# Altium PCB analogtestboard.PCBDOC (part 2 of 2)
Units mil, origin at the board's own origin, x right, y up, seen from the top; angles counter-clockwise.
Board outline 5890 x 7000 mil, 4 copper layers (Top Layer, Internal Plane 1, Internal Plane 2, Bottom Layer); 280 components, 161 nets, 858 pads, 237 vias.
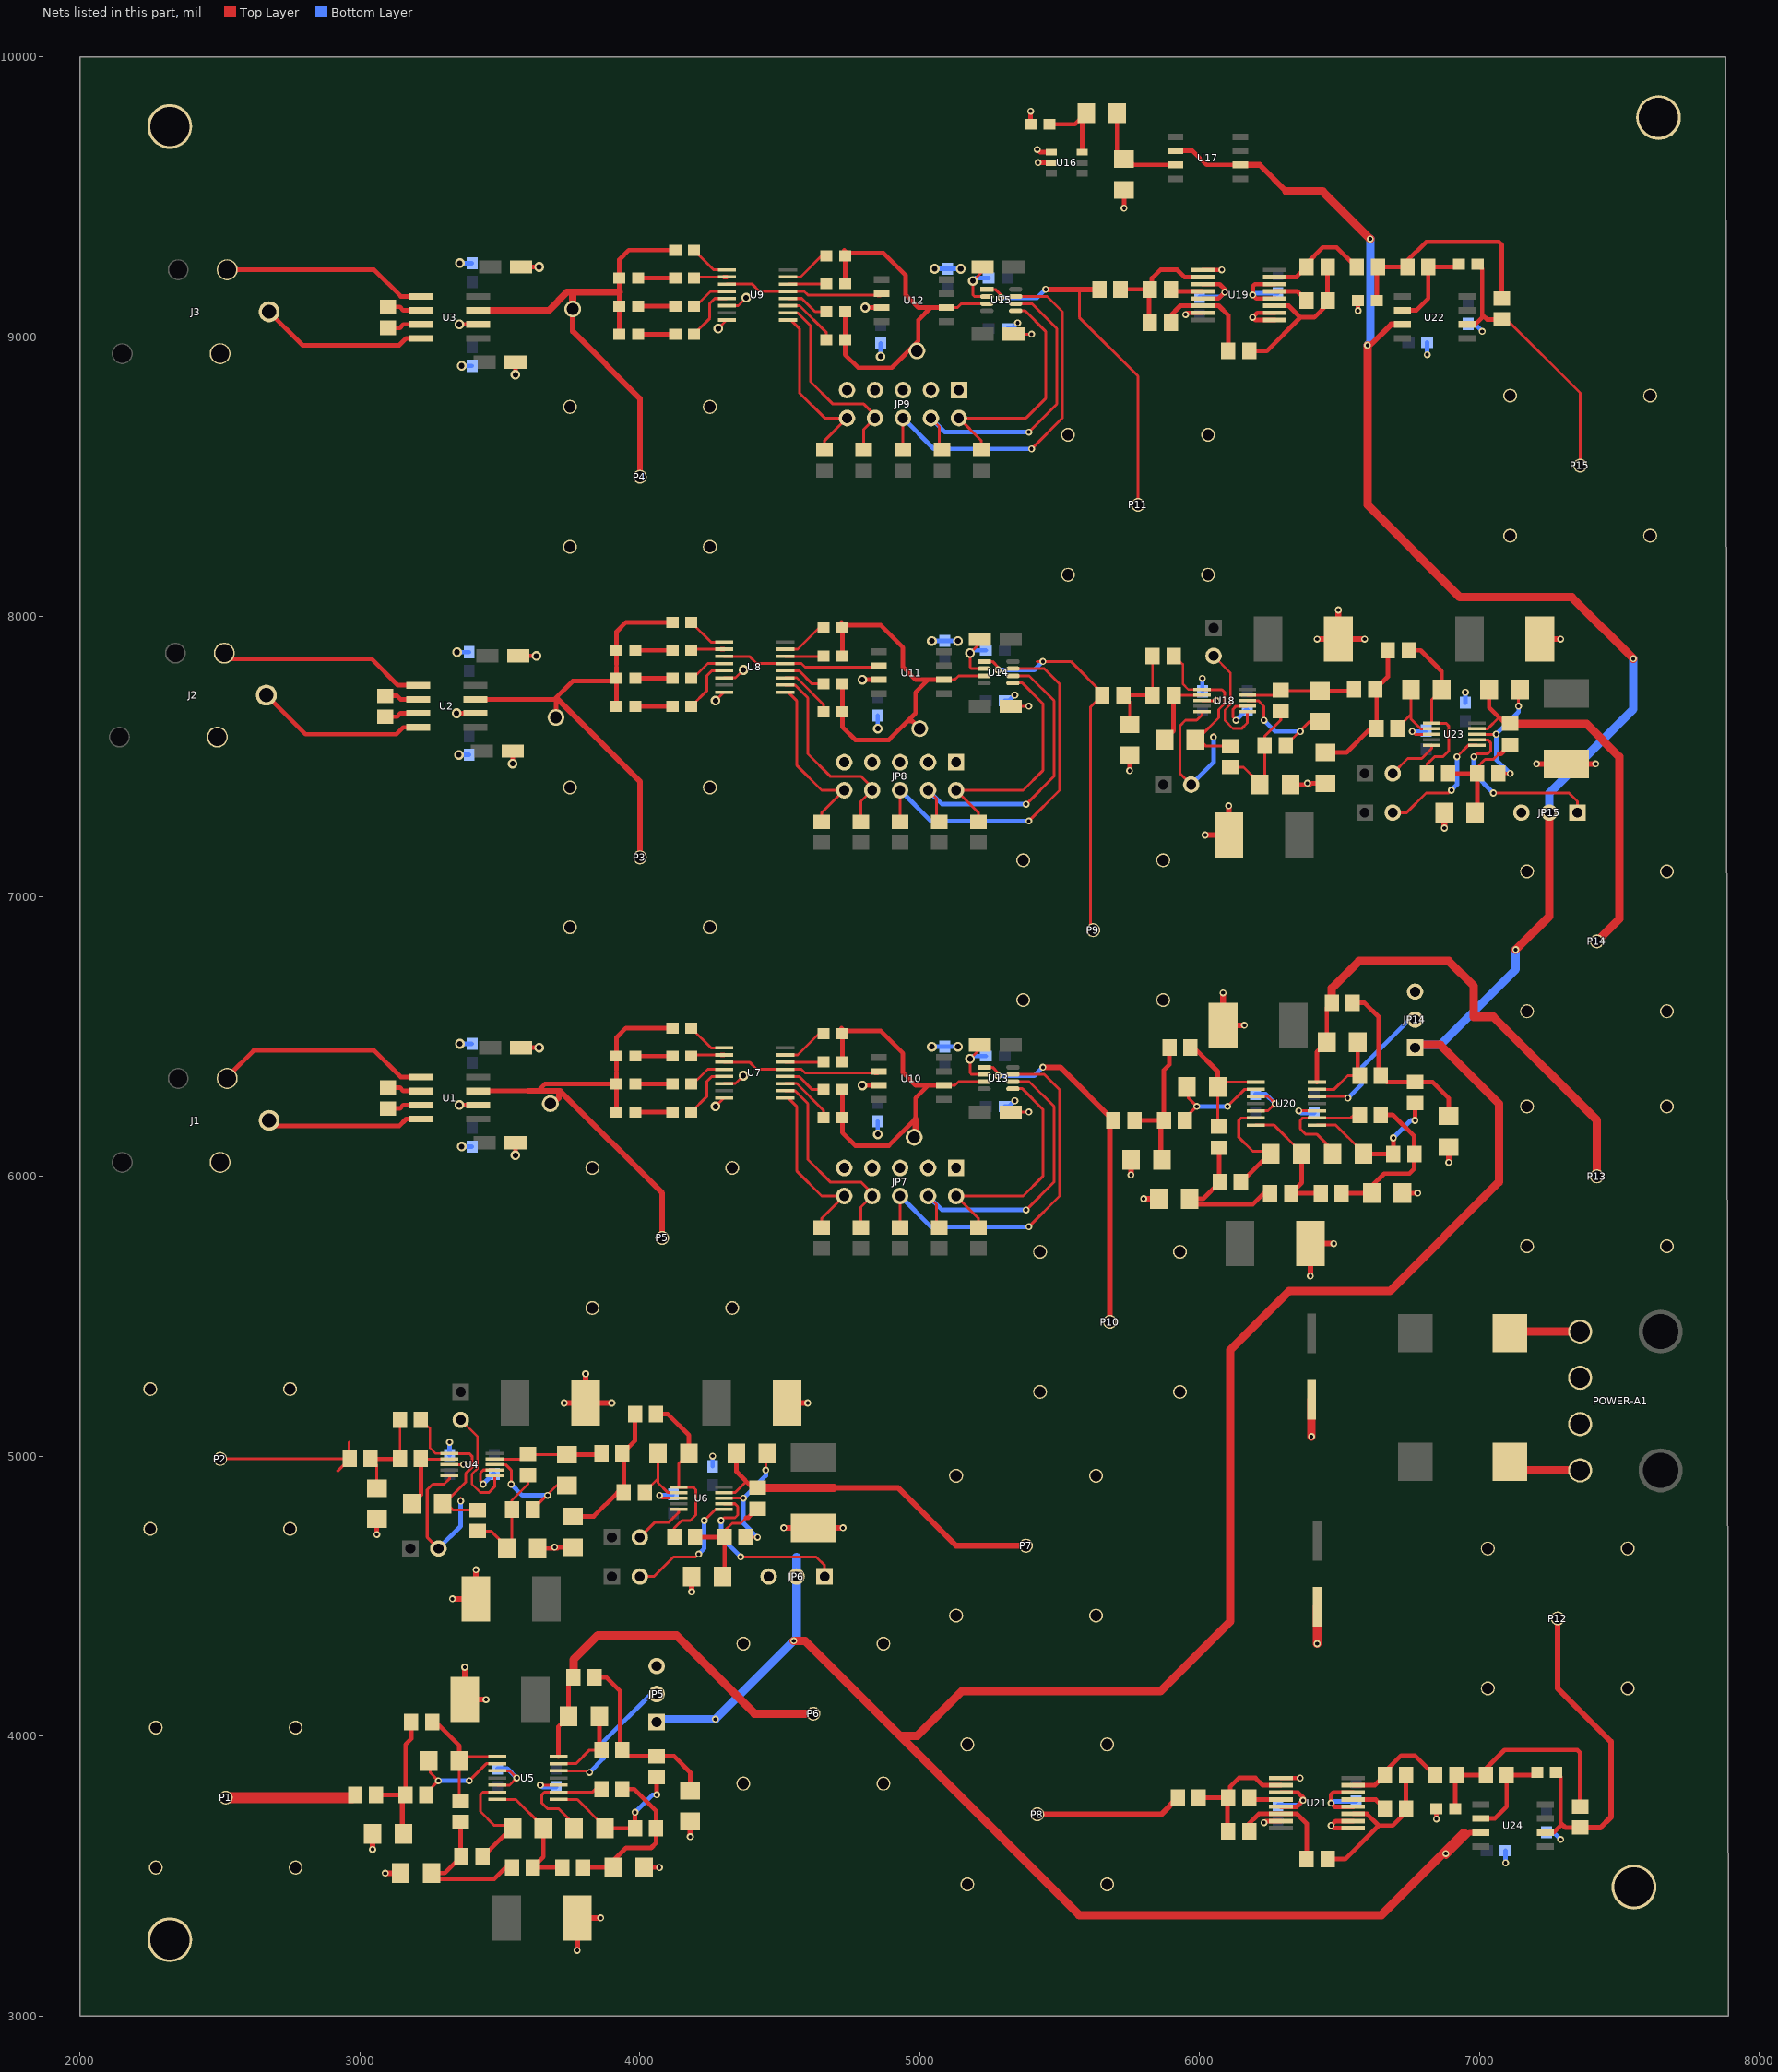
[diagram p4: the nets of this part, all layers, seen from the top]

## Via types
v1: diameter 25, hole 13.5, Top Layer to Bottom Layer, 177 vias
v2: diameter 35, hole 20, Top Layer to Bottom Layer, 60 vias

## Nets (pads, with @x,y where several pads share a name; then routed paths per layer and width w, separated by ;. In a path a pad name is that pad's centre, name@x,y a point inside that pad or via, vN(x,y) a via of type N, cw(c..) or ccw(c..) an arc to the next point about the centre after c; other vN are vias at no path point) (continued)
GND: C1.1 C2.1 C3.1 C6.1 C7.1 C8.1 C9.1 C10.2 C11.2 C13.1 C14.2 C15.2 C16.1 C17.2 C19.1 C21.1 C32.1 C34.1 C35.2 C37.1 C38.1 C39.2 C40.1 C41.2 C42.1 C43.2 C44.2 C45.1 C46.1 C47.1 C50.2 C51.1 C52.1 C54.1 C55.2 C56.2 C57.1 C58.1 C60.1 C61.1 C64.1 C65.1 C67.1 C68.2 C72.1 C73.2 C74.2 C75.2 C76.2 C77.2 C78.2 C79.2 C80.1 C81.1 C82.2 C83.2 C84.1 C85.1 C86.1 C87.1 C88.1 C89.1 C90.1 C91.1 C92.2 C93.1 C94.2 C95.1 C96.2 C97.1 C98.2 C99.1 C100.1 C101.1 C102.1 C103.2 C104.1 C105.1 C106.2 C107.1 C108.1 C109.1 C110.1 J1.1 J2.1 J3.1 JP5.3 JP6.3 JP7.1 JP7.3 JP7.5 JP7.7 JP7.9 JP8.1 JP8.3 JP8.5 JP8.7 JP8.9 JP9.1 JP9.3 JP9.5 JP9.7 JP9.9 JP14.3 JP15.3 P1.2 P2.2 P3.2 P4.2 P5.2 P6.2 P7.2 P8.2 P9.2 P10.2 P11.2 P12.2 P13.2 P14.2 P15.2 pad.0@7640,9784 pad.1@7552,3460 pad.2 pad.3 POWER-A1.2 POWER-A1.3 R73.1 U1.6 U2.6 U3.6 U4.3 U4.7 U5.3 U5.5 U5.10 U6.3 U7.6 U7.8 U8.6 U8.8 U9.6 U9.8 U10.3 U11.3 U12.3 U13.2 U14.2 U15.2 U16.1 U16.2 U18.3 U18.7 U19.1 U19.3 U19.5 U19.7 U19.9 U19.10 U19.12 U19.14 U20.3 U20.5 U20.10 U21.1 U21.3 U21.5 U21.7 U21.9 U21.10 U21.12 U21.14 U23.3 | length 10008.2
  Top Layer w10: U4.3@3319.29,4970 v1(3370,4970) ; 3439.68,4950.31 U4.7@3480.71,4950.31 ; v1(3440,4900) 3430,4910 3430,4940 3440.32,4950.31 ; U5.5@3490.75,3824.41 3534.41,3824.41 v1(3560,3850) 3534.41,3875.59 U5.3@3490.75,3875.59 ; v1(3644.41,3824.41) U5.10@3709.25,3824.41 ; v1(4070,4860) 4080,4850 U6.3@4130,4850 ; v2(4270,6250) 4300.43,6280.43 U7.8@4300.75,6280.43 ; v2(4270,7700) 4300.43,7730.43 U8.8@4300.75,7730.43 ; v2(4280,9030) 4310.43,9060.43 U9.8@4310.75,9060.43 ; U7.6@4300.75,6331.61 4341.61,6331.61 v2(4370,6360) ; U8.6@4300.75,7781.61 4341.61,7781.61 v2(4370,7810) ; U9.6@4310.75,9111.61 4351.61,9111.61 v2(4380,9140) ; C39.2@5214.88,6470 5214.88,6454.88 v2(5180,6420) 5180,6370 5185.59,6364.41 U13.2@5230,6364.41 ; C41.2@5214.88,7920 5214.88,7904.88 v2(5180,7870) 5180,7820 5185.59,7814.41 U14.2@5230,7814.41 ; C43.2@5224.88,9250 5224.88,9234.88 v2(5190,9200) 5190,9150 5195.59,9144.41 U15.2@5240,9144.41 ; C38.1@5325.12,6230 v1(5390,6230) ; C40.1@5325.12,7680 v1(5390,7680) ; C42.1@5335.12,9010 v1(5400,9010) ; U18.3@6009.29,7700 v1(6060,7700) ; 6129.69,7680.31 U18.7@6170.71,7680.31 ; v1(6130,7630) 6120,7640 6120,7670 6130.31,7680.31 ; U20.5@6200.75,6234.41 6244.41,6234.41 v1(6270,6260) 6244.41,6285.59 U20.3@6200.75,6285.59 ; v1(6354.41,6234.41) U20.10@6419.25,6234.41 ; v1(6760,7590) 6770,7580 U23.3@6820,7580
  Top Layer w16: v1(3060,4720) C2.1@3060,4774.88 ; v2(3345,7655) U2.6@3412.36,7655 ; v2(3355,6255) U1.6@3422.36,6255 ; v2(3355,9045) U3.6@3422.36,9045 ; v2(3545.12,7475.12) C9.1@3545.12,7520 ; v2(3555.12,6075.12) C8.1@3555.12,6120 ; v2(3555.12,8865.12) C16.1@3555.12,8910 ; C10.2@3565.12,7860 v2(3630,7860) ; C15.2@3575.12,6460 v2(3640,6460) ; C17.2@3575.12,9250 v2(3640,9250) ; C13.1@3635.12,4670 3705.12,4670 3710,4674.88 ; v1(3695.12,4674.88) C19.1@3760,4674.88 ; C21.1@4015.12,3530.01 v1(4070,3530) ; v2(4795,6325) U10.3@4853.86,6325 ; v2(4795,7775) U11.3@4853.86,7775 ; v2(4805,9105) U12.3@4863.86,9105 ; C44.2@5396.54,9760 v1(5396.54,9806.54) ; v1(5420,9670) 5430,9660 U16.1@5470,9660 ; v1(5422.6,9622.6) U16.2@5470,9622.6 ; v1(5730,9460) R73.1@5730,9524.88 ; v1(5750,7450) C46.1@5750,7504.88 ; v1(5950,9080) 5956.02,9086.02 U19.7@6011.06,9086.02 ; U19.5@6011.06,9137.2 6067.2,9137.2 v1(6090,9160) 6090,9170 6071.61,9188.39 U19.3@6011.06,9188.39 ; U19.1@6011.06,9239.57 v1(6079.57,9239.57) ; v1(6230,3690) 6236.02,3696.02 U21.7@6291.06,3696.02 ; U19.9@6268.94,9060.43 6199.57,9060.43 v1(6190,9070) 6206.02,9086.02 U19.10@6268.94,9086.02 ; U19.12@6268.94,9137.2 6202.8,9137.2 v1(6190,9150) 6190,9180 6198.39,9188.39 U19.14@6268.94,9188.39 ; U21.5@6291.06,3747.2 6347.2,3747.2 v1(6370,3770) 6370,3780 6351.61,3798.39 U21.3@6291.06,3798.39 ; U21.1@6291.06,3849.57 v1(6359.57,3849.57) ; C54.1@6325.12,7400 6395.12,7400 6400,7404.88 ; v1(6385.12,7404.88) C58.1@6450,7404.88 ; U21.9@6548.94,3670.43 6479.57,3670.43 v1(6470,3680) 6486.02,3696.02 U21.10@6548.94,3696.02 ; U21.12@6548.94,3747.2 6482.8,3747.2 v1(6470,3760) 6470,3790 6478.39,3798.39 U21.14@6548.94,3798.39 ; v1(6566.54,9093.46) C60.1@6566.54,9130 ; C61.1@6725.12,5940 v1(6780,5940) ; v1(6846.54,3703.46) C64.1@6846.54,3740
  Top Layer w20: v1(3044.88,3594.88) C1.1@3044.88,3650 ; v1(3090,3510) C3.1@3144.88,3510 ; v1(3330,4490) C7.1@3414.02,4490 v1(3414.02,4594.02) ; v1(3374.02,4245.98) C6.1@3374.02,4130 v1(3450,4130) ; v1(3730,5190) v1(3900,5190) ; v1(3775.98,3234.02) C11.2@3775.98,3350 v1(3860,3350) ; C14.2@3805.98,5190 v1(3805.98,5294.02) ; v1(4180,3640) C34.1@4180,3694.88 ; v1(4184.88,4514.88) C32.1@4184.88,4570 ; v1(4514.02,4744.02) v1(4725.98,4744.02) ; C35.2@4525.98,5190 v1(4600,5190) ; v1(5754.88,6004.88) C45.1@5754.88,6060 ; v1(5800,5920) C47.1@5854.88,5920 ; v1(6020,7220) C52.1@6104.02,7220 v1(6104.02,7324.02) ; v1(6084.02,6655.98) C51.1@6084.02,6540 v1(6160,6540) ; v1(6395.98,5644.02) C50.2@6395.98,5760 v1(6480,5760) ; v1(6420,7920) v1(6590,7920) ; C55.2@6495.98,7920 v1(6495.98,8024.02) ; v1(6874.88,7244.88) C65.1@6874.88,7300 ; v1(6890,6050) C67.1@6890,6104.88 ; v1(7204.02,7474.02) v1(7415.98,7474.02) ; C68.2@7215.98,7920 v1(7290,7920)
  Top Layer w30: v1(6400,5070) C57.1@6400,5201.89 ; v1(6420,4330) C56.2@6420,4461.89
  Bottom Layer w16: C73.2@3320,5003.46 v1(3320,5050) ; v2(3346.54,7873.46) C77.2@3390,7873.46 ; v2(3353.46,7506.54) C76.2@3390,7506.54 ; v2(3356.54,6473.46) C75.2@3400,6473.46 ; v2(3356.54,9263.46) C79.2@3400,9263.46 ; v2(3363.46,6106.54) C74.2@3400,6106.54 ; v2(3363.46,8896.54) C78.2@3400,8896.54 ; v1(3440,4900) 3476.54,4936.54 C81.1@3480,4936.54 ; C80.1@3490.75,3883.46 3526.54,3883.46 v1(3560,3850) ; v1(3644.41,3824.41) 3652.28,3816.54 C82.2@3700,3816.54 ; v1(4070,4860) C83.2@4116.54,4860 ; C84.1@4260,4963.46 v1(4260,5000) ; v2(4850,6150) C85.1@4850,6196.54 ; v2(4850,7600) C86.1@4850,7646.54 ; v2(4860,8930) C87.1@4860,8976.54 ; v2(5043.46,6463.46) v2(5136.54,6463.46) ; v2(5043.46,7913.46) v2(5136.54,7913.46) ; v2(5053.46,9243.46) v2(5146.54,9243.46) ; v2(5180,6420) 5190,6430 C92.2@5236.54,6430 ; v2(5180,7870) 5190,7880 C94.2@5236.54,7880 ; v2(5190,9200) 5200,9210 C96.2@5246.54,9210 ; C91.1@5303.46,6250 5320,6250 v1(5340,6270) ; C93.1@5303.46,7700 5320,7700 v1(5340,7720) ; C95.1@5313.46,9030 5330,9030 v1(5350,9050) ; C97.1@6000,9143.46 6073.46,9143.46 v1(6090,9160) ; C98.2@6010,7733.46 v1(6010,7780) ; v1(6130,7630) 6166.54,7666.54 C99.1@6170,7666.54 ; v1(6190,9150) 6196.54,9156.54 C102.1@6280,9156.54 ; C101.1@6200.75,6293.46 6236.54,6293.46 v1(6270,6260) ; C100.1@6280,3753.46 6353.46,3753.46 v1(6370,3770) ; v1(6354.41,6234.41) 6362.28,6226.54 C103.2@6410,6226.54 ; v1(6470,3760) 6476.54,3766.54 C104.1@6560,3766.54 ; v1(6760,7590) C106.2@6806.54,7590 ; v1(6813.46,8936.54) C105.1@6813.46,8980 ; C107.1@6950,7693.46 v1(6950,7730) ; C108.1@6960,9046.54 6983.46,9046.54 v1(7010,9020) ; v1(7093.46,3546.54) C109.1@7093.46,3590 ; C110.1@7240,3656.54 7263.46,3656.54 v1(7290,3630)
NetC1_AA85131_1: C48.1 R79.1 R84.1 U20.1 | length 475.1
  Top Layer w10: R79.1@5967.4,6460 R79.1@5980,6460 ; R84.1@6070,6177.4 6065.12,6182.28 C48.1@6065.12,6320 6081.89,6336.77 U20.1@6200.75,6336.77
  Top Layer w16: R79.1@5980,6460 6065.12,6374.88 C48.1@6065.12,6320
NetC1_AA85131_2: C48.2 R72.2 U20.2 | length 396.2
  Top Layer w10: R72.2@5947.4,6200 5947.4,6207.4 v1(5990,6250) 5960,6280 C48.2@5960,6330 ; v1(6100,6250) 6161.18,6311.18 U20.2@6200.75,6311.18
  Bottom Layer w16: v1(5990,6250) v1(6100,6250)
NetC1_AA85132_1: C4.1 R5.1 R11.1 U5.1 | length 475.1
  Top Layer w10: R5.1@3257.4,4050 R5.1@3270,4050 ; R11.1@3360,3767.4 3355.12,3772.28 C4.1@3355.12,3910.01 3371.89,3926.77 U5.1@3490.75,3926.77
  Top Layer w16: R5.1@3270,4050 3355.12,3964.88 C4.1@3355.12,3910.01
NetC1_AA85132_2: C4.2 R3.2 U5.2 | length 396.2
  Top Layer w10: R3.2@3237.4,3790 3237.4,3797.4 v1(3280,3840) 3250,3870 C4.2@3250,3920 ; v1(3390,3840) 3451.18,3901.18 U5.2@3490.75,3901.18
  Bottom Layer w16: v1(3280,3840) v1(3390,3840)
NetC2_AA85131_1: C53.1 R88.1 R90.1 U20.7 | length 466.1
  Top Layer w10: U20.7@6200.75,6183.23 6266.77,6183.23 C53.1@6360,6090
  Top Layer w16: C53.1@6365.12,6080 6365.12,5977.72 R88.1@6327.4,5940 R90.1@6440,5940
NetC2_AA85131_2: C53.2 R83.2 U20.6 | length 409.1
  Top Layer w10: U20.6@6200.75,6208.82 6148.82,6208.82 6140,6200 6140,6140 6190,6090 C53.2@6250,6090
  Top Layer w16: R83.2@6147.4,5980 6150,5980 C53.2@6250,6080 ; C53.2@6250,6090 C53.2@6260,6090
NetC2_AA85132_1: C12.1 R13.1 R16.1 U5.7 | length 466.1
  Top Layer w10: U5.7@3490.75,3773.23 3556.77,3773.23 C12.1@3650,3680
  Top Layer w16: C12.1@3655.12,3670 3655.12,3567.72 3617.4,3530 R16.1@3730,3530
NetC2_AA85132_2: C12.2 R12.2 U5.6 | length 409.1
  Top Layer w10: U5.6@3490.75,3798.82 3438.82,3798.82 3430,3790 3430,3730 3480,3680 C12.2@3540,3680
  Top Layer w16: R12.2@3437.4,3570 3440,3570 C12.2@3540,3670 ; C12.2@3540,3680 C12.2@3550,3680
NetC3_AA85131_1: C62.1 R100.1 R104.1 U20.8 | length 542.3
  Top Layer w10: U20.8@6419.25,6183.23 6486.77,6183.23 C62.1@6575.66,6094.34
  Top Layer w16: C62.1@6575.66,6094.34 6585.12,6084.88 C62.1@6585.12,6080 R100.1@6692.6,6080 v1(6692.6,6137.4) ; v1(6770,6200) R104.1@6770,6262.6
  Bottom Layer w16: v1(6692.6,6137.4) 6755.2,6200 v1(6770,6200)
NetC3_AA85131_2: C62.2 R93.2 U20.9 | length 411.9
  Top Layer w10: C62.2@6474.88,6095.12 6420,6150 6380,6150 6360,6170 6360,6200 6368.82,6208.82 6540,6208.82 6551.18,6220 R93.2@6572.6,6220
  Top Layer w16: C62.2@6474.88,6080 C62.2@6474.88,6095.12
NetC3_AA85132_1: C22.1 R22.1 R23.1 U5.8 | length 542.3
  Top Layer w10: U5.8@3709.25,3773.23 3776.77,3773.23 C22.1@3865.66,3684.34
  Top Layer w16: C22.1@3865.66,3684.34 3875.12,3674.88 C22.1@3875.12,3670 R22.1@3982.6,3670 v1(3982.6,3727.4) ; v1(4060,3790) R23.1@4060,3852.6
  Bottom Layer w16: v1(3982.6,3727.4) 4045.2,3790 v1(4060,3790)
NetC3_AA85132_2: C22.2 R17.2 U5.9 | length 411.9
  Top Layer w10: C22.2@3764.88,3685.12 3710,3740 3670,3740 3650,3760 3650,3790 3658.82,3798.82 3830,3798.82 3841.18,3810 R17.2@3862.6,3810
  Top Layer w16: C22.2@3764.88,3670 C22.2@3764.88,3685.12
NetC4_AA85131_1: C63.1 P13.1 R95.1 U20.14 | length 1836.2
  Top Layer w16: U20.14@6419.25,6336.77 6419.25,6444.37 C63.1@6454.88,6480 6454.88,6602.28 R95.1@6472.6,6620
  Top Layer w30: R95.1@6472.6,6620 6472.6,6672.6 6570,6770 6890,6770 6980,6680 6980,6570 7050,6570 7420,6200 P13.1@7420,6010
NetC4_AA85131_2: C63.2 R94.2 U20.13 | length 296.7
  Top Layer w10: U20.13@6419.25,6311.18 6481.18,6311.18 6530,6360 R94.2@6572.6,6360
  Top Layer w16: C63.2@6565.12,6480 6565.12,6367.48 R94.2@6572.6,6360
NetC4_AA85132_1: C18.1 P6.1 R19.1 U5.14 | length 1367.5
  Top Layer w16: U5.14@3709.25,3926.77 3709.25,4034.37 C18.1@3744.88,4070 3744.88,4192.28 R19.1@3762.6,4210
  Top Layer w30: R19.1@3762.6,4210 3762.6,4262.6 ; 3762.6,4272.6 3850,4360 4130,4360 4410,4080 P6.1@4620,4080
NetC4_AA85132_2: C18.2 R18.2 U5.13 | length 296.7
  Top Layer w10: U5.13@3709.25,3901.18 3771.18,3901.18 3820,3950 R18.2@3862.6,3950
  Top Layer w16: C18.2@3855.12,4070 3855.12,3957.48 R18.2@3862.6,3950
NetC5_AA85131_2: C45.2 R71.2 R72.1 R79.2 | length 656
  Top Layer w10: C45.2@5865.12,6060 R72.1@5865.12,6192.52
  Top Layer w16: R71.2@5767.4,6200 R72.1@5872.6,6200 5872.6,6380 5892.6,6400 R79.2@5892.6,6460 ; C45.2@5860,6050 R72.1@5860,6200
NetC5_AA85132_2: C1.2 R1.2 R3.1 R5.2 | length 656
  Top Layer w10: C1.2@3155.12,3650 R3.1@3155.12,3782.52
  Top Layer w16: R1.2@3057.4,3790 R3.1@3162.6,3790 3162.6,3970 3182.6,3990 R5.2@3182.6,4050 ; C1.2@3150,3640 R3.1@3150,3790
NetC6_AA85131_2: C47.2 R83.1 R84.2 R88.2 | length 561.5
  Top Layer w10: R83.1@6072.6,5980 R83.1@6072.6,5982.6
  Top Layer w16: C47.2@5950,5920 6012.6,5920 R83.1@6072.6,5980 ; C47.2@5985.12,5900 6190,5900 6230,5940 R88.2@6252.6,5940 ; R83.1@6070,5982.6 R84.2@6070,6110
NetC6_AA85132_2: C3.2 R11.2 R12.1 R13.2 | length 561.5
  Top Layer w10: R12.1@3362.6,3570 R12.1@3362.6,3572.6
  Top Layer w16: C3.2@3240,3510 3302.6,3510 R12.1@3362.6,3570 ; C3.2@3275.12,3490 3480,3490 3520,3530 R13.2@3542.6,3530 ; R12.1@3360,3572.6 R11.2@3360,3700
NetC7_AA85131_2: C61.2 R90.2 R93.1 R100.2 | length 580.1
  Top Layer w16: R90.2@6507.4,5940 C61.2@6614.88,5940 ; C61.2@6610,5940 6610,5960 6660,6010 6750,6010 6767.4,6027.4 6767.4,6142.6 6690,6220 R93.1@6647.4,6220
NetC7_AA85132_2: C21.2 R16.2 R17.1 R22.2 | length 580.1
  Top Layer w16: R16.2@3797.4,3530 C21.2@3904.88,3530.01 ; C21.2@3900,3530 3900,3550 3950,3600 4040,3600 4057.4,3617.4 4057.4,3732.6 3980,3810 R17.1@3937.4,3810
NetC8_AA85131_2: C67.2 R94.1 R95.2 R104.2 | length 667
  Top Layer w16: R95.2@6547.4,6620 6590,6620 6640,6570 6640,6367.4 6670,6337.4 6832.6,6337.4 6890,6280 C67.2@6890,6215.12
NetC8_AA85132_2: C34.2 R18.1 R19.2 R23.2 | length 667
  Top Layer w16: R19.2@3837.4,4210 3880,4210 3930,4160 3930,3957.4 3960,3927.4 4122.6,3927.4 4180,3870 C34.2@4180,3805.12
NetC19_PGA1_1: C29.1 R34.1 | length 133.1
  Top Layer w16: C29.1@3993.46,9010 R34.1@4126.54,9010
NetC19_PGA1_2: C29.2 C30.2 C31.2 P4.1 pad.1@3760,9100 R37.1 U3.7 | length 1773.3
  Top Layer w16: U3.7@3410,9090 U3.7@3422.36,9090 ; C29.2@3926.54,9010 3926.54,9150 ; 3926.54,9160 3926.54,9276.54 3960,9310 R37.1@4126.54,9310
  Top Layer w20: pad.1@3760,9100 3760,9020 4000,8780 P4.1@4000,8500
  Top Layer w25: U3.7@3422.36,9095 3675,9095 3740,9160 3926.54,9160 ; pad.1@3760,9100 3760,9160
NetC19_PGA2_1: C23.1 R26.1 | length 133.1
  Top Layer w16: C23.1@3983.46,6230 R26.1@4116.54,6230
NetC19_PGA2_2: C23.2 C24.2 C25.2 P5.1 pad.1@3680,6260 R29.1 U1.7 | length 1784.4
  Top Layer w16: U1.7@3422.36,6305 3600,6305 ; 3635,6305 3660,6330 C24.2@3916.54,6330 ; C23.2@3916.54,6230 3916.54,6370 ; 3916.54,6380 3916.54,6496.54 3950,6530 R29.1@4116.54,6530
  Top Layer w20: 3600,6305 3715,6305 4080,5940 P5.1@4080,5780 ; pad.1@3690,6260 3710,6280 3710,6305
NetC19_PGA3_1: C26.1 R30.1 | length 133.1
  Top Layer w16: C26.1@3983.46,7680 R30.1@4116.54,7680
NetC19_PGA3_2: C26.2 C27.2 C28.2 P3.1 pad.1@3700,7640 R33.1 U2.7 | length 1769.5
  Top Layer w10: 3695,7705 3706.33,7705
  Top Layer w16: U2.7@3412.36,7705 3695,7705 3760,7770 C27.2@3916.54,7770 ; pad.1@3700,7640 3700,7710 ; C26.2@3916.54,7680 3916.54,7820 ; 3916.54,7830 3916.54,7946.54 3950,7980 R33.1@4116.54,7980
  Top Layer w20: 3706.33,7705 4000,7411.33 P3.1@4000,7140
NetC21_PGA1_1: C31.1 R36.1 | length 133.1
  Top Layer w16: C31.1@3993.46,9210 R36.1@4126.54,9210
NetC21_PGA2_1: C25.1 R28.1 | length 133.1
  Top Layer w16: C25.1@3983.46,6430 R28.1@4116.54,6430
NetC21_PGA3_1: C28.1 R32.1 | length 133.1
  Top Layer w16: C28.1@3983.46,7880 R32.1@4116.54,7880
NetC23_PGA1_1: C30.1 R35.1 | length 133.1
  Top Layer w16: C30.1@3993.46,9110 R35.1@4126.54,9110
NetC23_PGA2_1: C24.1 R27.1 | length 133.1
  Top Layer w16: C24.1@3983.46,6330 R27.1@4116.54,6330
NetC23_PGA3_1: C27.1 R31.1 | length 133.1
  Top Layer w16: C27.1@3983.46,7780 R31.1@4116.54,7780
NetC26_aa80281_1: C49.1 R75.1 R80.1 U18.1 | length 619.3
  Top Layer w8: R75.1@5900,7870 5940,7830 5940,7760 5960.63,7739.37 U18.1@6009.29,7739.37
  Top Layer w10: C49.1@5992.56,7567.44 5990,7570 6000,7570 6068.36,7638.36 6068.36,7668.36 6090,7690 6090,7730 6080.63,7739.37 U18.1@6009.29,7739.37 ; C49.1@6000,7560 6022.6,7537.4 R80.1@6110.01,7537.4
NetC26_aa80281_2: C49.2 R74.2 U18.2 | length 244.9
  Top Layer w10: R74.2@5907.4,7720 5907.72,7719.69 U18.2@6009.29,7719.69
  Top Layer w16: C49.2@5896.54,7581.66 5907.4,7592.52 R74.2@5907.4,7720
NetC26_aa80282_1: C5.1 R7.1 R10.1 U4.1 | length 619.3
  Top Layer w8: R7.1@3210,5140 3250,5100 3250,5030 3270.63,5009.37 U4.1@3319.29,5009.37
  Top Layer w10: C5.1@3302.56,4837.44 3300,4840 3310,4840 3378.36,4908.36 3378.36,4938.36 3400,4960 3400,5000 3390.63,5009.37 U4.1@3319.29,5009.37 ; C5.1@3310,4830 3332.6,4807.4 R10.1@3420.02,4807.4
NetC26_aa80282_2: C5.2 R6.2 U4.2 | length 244.9
  Top Layer w10: R6.2@3217.4,4990 3217.72,4989.69 U4.2@3319.29,4989.69
  Top Layer w16: C5.2@3206.54,4851.66 3217.4,4862.52 R6.2@3217.4,4990
NetC27_aa80281_1: C59.1 R89.1 R96.1 U18.9 | length 397.8
  Top Layer w10: U18.9@6170.71,7719.69 6272.28,7719.69 6287.72,7735.12 C59.1@6429.98,7735.12
  Top Layer w16: C59.1@6429.98,7735.12 6554.88,7735.12 R96.1@6560,7730
NetC27_aa80281_2: C59.2 R86.2 U18.8 | length 421.9
  Top Layer w10: U18.8@6170.71,7700 6210,7700 6230,7680 v1(6230,7630) ; R86.2@6307.4,7540 6392.28,7624.88 C59.2@6429.98,7624.88
  Bottom Layer w16: v1(6230,7630) 6270,7590 v1(6360,7590)
NetC27_aa80282_1: C20.1 R15.1 R20.1 U4.9 | length 397.8
  Top Layer w10: U4.9@3480.71,4989.69 3582.28,4989.69 3597.72,5005.12 C20.1@3739.98,5005.12
  Top Layer w16: C20.1@3739.98,5005.12 3864.88,5005.12 R20.1@3870,5000
NetC27_aa80282_2: C20.2 R14.2 U4.8 | length 421.9
  Top Layer w10: U4.8@3480.71,4970 3520,4970 3540,4950 v1(3540,4900) ; R14.2@3617.4,4810 3702.28,4894.88 C20.2@3739.98,4894.88
  Bottom Layer w16: v1(3540,4900) 3580,4860 v1(3670,4860)
NetC28_aa80281_1: C66.1 R101.1 R105.1 U23.1 | length 638.5
  Top Layer w10: R105.1@6812.6,7440 6812.6,7472.6 6840,7500 6870,7500 6890,7520 6890,7610 6880.63,7619.37 U23.1@6829.29,7619.37 6829.29,7704.17 C66.1@6865.12,7740
  Top Layer w16: R101.1@6747.4,7880 6790,7880 6865.12,7804.88 C66.1@6865.12,7734.88
NetC28_aa80281_2: C66.2 R97.2 U23.2 | length 278.2
  Top Layer w10: R97.2@6700,7610 6707.44,7602.56 6708.7,7601.3 R97.2@6710.31,7599.69 ; R97.2@6707.4,7600 6707.4,7602.52 6754.88,7650 ; C66.2@6754.88,7740 6754.88,7635.12 6790.31,7599.69 U23.2@6829.29,7599.69
NetC28_aa80282_1: C33.1 R24.1 R25.1 U6.1 | length 638.5
  Top Layer w10: R25.1@4122.6,4710 4122.6,4742.6 4150,4770 4180,4770 4200,4790 4200,4880 4190.63,4889.37 U6.1@4139.29,4889.37 4139.29,4974.17 C33.1@4175.12,5010
  Top Layer w16: R24.1@4057.4,5150 4100,5150 4175.12,5074.88 C33.1@4175.12,5004.88
NetC28_aa80282_2: C33.2 R21.2 U6.2 | length 278.2
  Top Layer w10: R21.2@4010,4880 4017.44,4872.56 4018.7,4871.3 R21.2@4020.32,4869.69 ; R21.2@4017.4,4870 4017.4,4872.52 4064.88,4920 ; C33.2@4064.88,5010 4064.88,4905.12 4100.31,4869.69 U6.2@4139.29,4869.69
NetC29_aa80281_1: C70.1 P14.1 R108.1 U23.9 | length 1394.7
  Top Layer w10: U23.9@6990.71,7599.69 7029.61,7599.69 7069.96,7640.04
  Top Layer w16: C70.1@7034.88,7740 7034.88,7675.12 7100,7610 R108.1@7110,7610
  Top Layer w30: R108.1@7110.01,7617.4 7382.6,7617.4 7500,7500 7500,6920 P14.1@7420,6840
NetC29_aa80281_2: C70.2 R106.2 U23.8 | length 479.9
  Top Layer w10: U23.8@6990.71,7580 v1(7060,7580) ; R106.2@7067.4,7440.03 v1(7110,7440) ; v1(7140,7680) 7140,7740 C70.2@7150,7750
  Bottom Layer w16: v1(7110,7440) 7060,7490 v1(7060,7580) 7140,7660 v1(7140,7680)
NetC29_aa80282_1: C36.1 P7.1 R39.1 U6.9 | length 1581.4
  Top Layer w10: U6.9@4300.71,4869.69 4339.61,4869.69 4379.96,4910.04
  Top Layer w16: C36.1@4344.88,5010 4344.88,4945.12 4410,4880 R39.1@4420,4880
  Top Layer w20: R39.1@4420.02,4887.4 4922.6,4887.4 5130,4680 P7.1@5380,4680
  Top Layer w30: R39.1@4420.02,4887.4 4692.6,4887.4
NetC29_aa80282_2: C36.2 R38.2 U6.8 | length 479.9
  Top Layer w10: U6.8@4300.71,4850 v1(4370,4850) ; R38.2@4377.4,4710 v1(4420,4710) ; v1(4450,4950) 4450,5010 C36.2@4460,5020
  Bottom Layer w16: v1(4420,4710) 4370,4760 v1(4370,4850) 4450,4930 v1(4450,4950)
NetC30_aa80281_2: C46.2 R67.2 R74.1 R75.2 | length 349.4
  Top Layer w8: R74.1@5832.6,7720 R75.2@5832.6,7860
  Top Layer w10: R67.2@5727.4,7720 5750,7697.4 C46.2@5750,7615.12
  Top Layer w16: R67.2@5737.4,7720 R74.1@5832.6,7720
NetC30_aa80282_2: C2.2 R2.2 R6.1 R7.2 | length 349.4
  Top Layer w8: R6.1@3142.6,4990 R7.2@3142.6,5130
  Top Layer w10: R2.2@3037.4,4990 3060,4967.4 C2.2@3060,4885.12
  Top Layer w16: R2.2@3047.4,4990 R6.1@3142.6,4990
NetC31_aa80281_2: C54.2 R80.2 R86.1 R89.2 | length 415.5
  Top Layer w10: R80.2@6110.01,7462.6 6157.4,7462.6 C54.2@6210,7410 ; C54.2@6214.88,7400 6232.6,7417.72 6232.6,7572.6 6290,7630 R89.2@6290.02,7662.6
NetC31_aa80282_2: C13.2 R10.2 R14.1 R15.2 | length 415.5
  Top Layer w10: R10.2@3420.02,4732.6 3467.4,4732.6 C13.2@3520,4680 ; C13.2@3524.88,4670 3542.6,4687.72 3542.6,4842.6 3600,4900 R15.2@3600.02,4932.6
NetC32_aa80281_2: C58.2 R96.2 R97.1 R101.2 | length 524.5
  Top Layer w16: C58.2@6450,7515.12 6525.12,7515.12 6610,7600 R97.1@6640,7600 ; R96.2@6625.12,7737.72 6672.6,7785.2 R101.2@6672.6,7880 ; R97.1@6632.6,7600 R96.2@6632.6,7737.4
NetC32_aa80282_2: C19.2 R20.2 R21.1 R24.2 | length 524.5
  Top Layer w16: C19.2@3760,4785.12 3835.12,4785.12 3920,4870 R21.1@3950,4870 ; R20.2@3935.12,5007.72 3982.6,5055.2 R24.2@3982.6,5150 ; R21.1@3942.6,4870 R20.2@3942.6,5007.4
NetC33_aa80281_2: C65.2 R105.2 R106.1 R108.2 | length 410.9
  Top Layer w10: R106.1@6992.6,7440.03 6992.6,7462.6 7020,7490 7050,7490 7070,7510
  Top Layer w16: R105.2@6887.4,7440 R106.1@6992.6,7440.03 C65.2@6992.6,7307.48 ; 7070,7510 7077.4,7510 R108.2@7110.01,7542.6
NetC33_aa80282_2: C32.2 R25.2 R38.1 R39.2 | length 410.9
  Top Layer w10: R38.1@4302.6,4710 4302.6,4732.6 4330,4760 4360,4760 4380,4780
  Top Layer w16: R25.2@4197.4,4710 R38.1@4302.6,4710 C32.2@4302.6,4577.48 ; 4380,4780 4387.4,4780 R39.2@4420.02,4812.6
NetC43_aafilter1_1: C69.1 P15.1 R109.2 U22.6 | length 981.1
  Top Layer w10: R109.2@7090,9070 7360,8800 P15.1@7360,8540
  Top Layer w16: U22.6@6955.16,9045 6985,9045 7010,9070 7010,9243.46 C69.1@6993.46,9260 ; 7010,9080 7027.4,9062.6 R109.2@7080,9062.6
NetC43_aafilter1_2: C69.2 R102.2 U22.2 | length 336
  Top Layer w16: U22.2@6724.84,9095 6775,9095 6817.4,9137.4 R102.2@6817.4,9250 6916.54,9250 C69.2@6926.54,9260
NetC43_aafilter2_1: C71.1 P12.1 R110.2 U24.6 | length 1263.4
  Top Layer w16: U24.6@7235.16,3655 7265,3655 7290,3680 7290,3853.46 C71.1@7273.46,3870 ; 7290,3690 7307.4,3672.6 R110.2@7360,3672.6
  Top Layer w20: P12.1@7280,4420 7280,4170 7470,3980 7470,3710 7432.6,3672.6 R110.2@7350,3672.6
NetC43_aafilter2_2: C71.2 R107.2 U24.2 | length 336
  Top Layer w16: U24.2@7004.84,3705 7055,3705 7097.4,3747.4 R107.2@7097.4,3860 7196.54,3860 C71.2@7206.54,3870
NetC45_aafilter1_2: C60.2 R98.2 R102.1 R109.1 | length 792.6
  Top Layer w16: C60.2@6633.46,9130 6633.46,9246.06 R98.2@6637.4,9250 R102.1@6742.6,9250 ; R102.1@6740,9270 6810,9340 7070,9340 7080,9330 R109.1@7080,9137.4
NetC45_aafilter2_2: C64.2 R103.2 R107.1 R110.1 | length 792.6
  Top Layer w16: C64.2@6913.46,3740 6913.46,3856.06 R103.2@6917.4,3860 R107.1@7022.6,3860 ; R107.1@7020,3880 7090,3950 7350,3950 7360,3940 R110.1@7360,3747.4
NetC53_1: C44.1 R70.2 U16.6 | length 273.3
  Top Layer w16: C44.1@5463.46,9760 5554.88,9760 R70.2@5594.88,9800 ; U16.6@5580.24,9660 R70.2@5580.24,9785.35
NetJ1_2: J2.2 U2.1 | length 740.3
  Top Layer w16: J2.2@2515,7870 2535,7850 3040.53,7850 3135.53,7755 U2.1@3207.64,7755
NetJ1_3: J2.3 U2.4 | length 611
  Top Layer w16: J2.3@2665,7720 2805,7580 3130,7580 3155,7605 U2.4@3207.64,7605
NetJ2_2: J1.2 U1.1 | length 764.3
  Top Layer w16: J1.2@2530,6360 2620,6450 3050.53,6450 3145.53,6355 U1.1@3217.64,6355
NetJ2_3: J1.3 U1.4 | length 561.3
  Top Layer w16: J1.3@2675,6200 2695,6180 3140,6180 3165,6205 U1.4@3217.64,6205
NetJ3_2: J3.2 U3.1 | length 727
  Top Layer w16: J3.2@2530,9240 3050.53,9240 3145.53,9145 U3.1@3217.64,9145
NetJ3_3: J3.3 U3.4 | length 602.7
  Top Layer w16: J3.3@2675,9090 2795,8970 3140,8970 3165,8995 U3.4@3217.64,8995
NetJP1_AA85131_2: JP14.2 U20.12 | length 504.2
  Top Layer w10: U20.12@6419.25,6285.59 6524.41,6285.59 v1(6530,6280)
  Bottom Layer w16: v1(6530,6280) 6580,6330 6580,6390 6750,6560 JP14.2@6770,6560
NetJP1_AA85132_2: JP5.2 U5.12 | length 504.2
  Top Layer w10: U5.12@3709.25,3875.59 3814.41,3875.59 v1(3820,3870)
  Bottom Layer w16: v1(3820,3870) 3870,3920 3870,3980 4040,4150 JP5.2@4060,4150
NetJP2_PGA1_2: JP9.2 R66.1 U15.5 | length 861.9
  Top Layer w10: R66.1@5220,8597.4 5220,8630 JP9.2@5140,8710 5380,8710 5450,8780 5450,9020 5376.77,9093.23 U15.5@5343.15,9093.23
NetJP2_PGA1_4: JP9.4 R63.1 U15.6 | length 1088.2
  Top Layer w10: JP9.4@5040,8710 5070,8680 R63.1@5070,8600 ; U15.6@5343.15,9118.82 5401.18,9118.82 5490,9030 5490,8760 v1(5390,8660)
  Bottom Layer w16: JP9.4@5040,8710 5090,8660 v1(5390,8660)
NetJP2_PGA1_6: JP9.6 R60.1 U15.7 | length 1343.1
  Top Layer w10: R60.1@4940,8597.4 JP9.6@4940,8710 ; U15.7@5343.15,9144.41 5455.59,9144.41 5510,9090 5510,8710 v1(5400,8600)
  Bottom Layer w16: JP9.6@4940,8710 5050,8600 v1(5400,8600)
NetJP2_PGA1_8: JP9.8 R53.1 U9.10 | length 718.7
  Top Layer w10: U9.10@4529.25,9086.02 4563.98,9086.02 4610,9040 4610,8840 4690,8760 4800,8760 4840,8720 JP9.8@4840,8710 4800,8670 R53.1@4800,8597.4
NetJP2_PGA1_10: JP9.10 R42.1 U9.9 | length 625.4
  Top Layer w10: U9.9@4540,9060 4570,9030 4570,8800 4660,8710 JP9.10@4740,8710 4660,8630 R42.1@4660,8597.4
NetJP2_PGA2_2: JP7.2 R64.1 U13.5 | length 861.9
  Top Layer w10: R64.1@5210,5817.4 5210,5850 JP7.2@5130,5930 5370,5930 5440,6000 5440,6240 5366.77,6313.23 U13.5@5333.15,6313.23
NetJP2_PGA2_4: JP7.4 R61.1 U13.6 | length 1088.2
  Top Layer w10: JP7.4@5030,5930 5060,5900 R61.1@5060,5820 ; U13.6@5333.15,6338.82 5391.18,6338.82 5480,6250 5480,5980 v1(5380,5880)
  Bottom Layer w16: JP7.4@5030,5930 5080,5880 v1(5380,5880)
NetJP2_PGA2_6: JP7.6 R58.1 U13.7 | length 1343.1
  Top Layer w10: R58.1@4930,5817.4 JP7.6@4930,5930 ; U13.7@5333.15,6364.41 5445.59,6364.41 5500,6310 5500,5930 v1(5390,5820)
  Bottom Layer w16: JP7.6@4930,5930 5040,5820 v1(5390,5820)
NetJP2_PGA2_8: JP7.8 R43.1 U7.10 | length 718.7
  Top Layer w10: U7.10@4519.25,6306.02 4553.98,6306.02 4600,6260 4600,6060 4680,5980 4790,5980 4830,5940 JP7.8@4830,5930 4790,5890 R43.1@4790,5817.4
NetJP2_PGA2_10: JP7.10 R40.1 U7.9 | length 625.4
  Top Layer w10: U7.9@4530,6280 4560,6250 4560,6020 4650,5930 JP7.10@4730,5930 4650,5850 R40.1@4650,5817.4
NetJP2_PGA3_2: JP8.2 R65.1 U14.5 | length 861.9
  Top Layer w10: R65.1@5209.99,7267.4 5210,7300 JP8.2@5130,7380 5370,7380 5440,7450 5440,7690 5366.77,7763.23 U14.5@5333.15,7763.23
NetJP2_PGA3_4: JP8.4 R62.1 U14.6 | length 1088.2
  Top Layer w10: JP8.4@5030,7380 5060,7350 R62.1@5060,7270 ; U14.6@5333.15,7788.82 5391.18,7788.82 5480,7700 5480,7430 v1(5380,7330)
  Bottom Layer w16: JP8.4@5030,7380 5080,7330 v1(5380,7330)
NetJP2_PGA3_6: JP8.6 R59.1 U14.7 | length 1343.1
  Top Layer w10: R59.1@4929.99,7267.4 JP8.6@4930,7380 ; U14.7@5333.15,7814.41 5445.59,7814.41 5500,7760 5500,7380 v1(5390,7270)
  Bottom Layer w16: JP8.6@4930,7380 5040,7270 v1(5390,7270)
NetJP2_PGA3_8: JP8.8 R48.1 U8.10 | length 718.7
  Top Layer w10: U8.10@4519.25,7756.02 4553.98,7756.02 4600,7710 4600,7510 4680,7430 4790,7430 4830,7390 JP8.8@4830,7380 4790,7340 R48.1@4790.01,7267.4
NetJP2_PGA3_10: JP8.10 R41.1 U8.9 | length 625.4
  Top Layer w10: U8.9@4530,7730 4560,7700 4560,7470 4650,7380 JP8.10@4730,7380 4650,7300 R41.1@4649.99,7267.4
NetJP3_aa80281_1: JP15.1 U23.7 | length 662.9
  Top Layer w10: v1(6979.89,7499.89) 6990,7510 7030,7510 7040,7520 7040,7550 7030,7560 U23.7@6991.02,7560 ; v1(7050,7370) 7320,7370 7350,7340 JP15.1@7350,7300
  Bottom Layer w16: v1(6979.89,7499.89) 6979.89,7440.11 v1(7050,7370)
NetJP3_aa80282_1: JP6.1 U6.7 | length 662.9
  Top Layer w10: v1(4289.89,4769.89) 4300,4780 4340,4780 4350,4790 4350,4820 4340,4830 U6.7@4301.02,4830 ; v1(4360,4640) 4630,4640 4660,4610 JP6.1@4660,4570
  Bottom Layer w16: v1(4289.89,4769.89) 4289.89,4710.11 v1(4360,4640)
NetL1_1: L1.1 POWER-A1.4 | length 249.3
  Top Layer w30: L1.1@7110.71,4949.29 POWER-A1.4@7360,4949.29
NetL2_1: L2.1 POWER-A1.1 | length 253.2
  Top Layer w30: L2.1@7109,5440 7114.35,5445.35 POWER-A1.1@7360,5445.35
NetP3_1: P9.1 R67.1 U14.1 | length 1385
  Top Layer w10: U14.1@5230,7840 5260,7840 5280,7820 v1(5280,7810) ; 5420,7840 5540,7840 5652.6,7727.4 R67.1@5652.6,7720 5610,7677.4 P9.1@5610,6880
  Bottom Layer w16: v1(5280,7810) 5410,7810 v1(5440,7840)
NetP6_1: P10.1 R71.1 U13.1 | length 1532.4
  Top Layer w10: U13.1@5230,6390 5260,6390 5280,6370 v1(5280,6360) ; 5522.6,6370 R71.1@5692.6,6200
  Top Layer w20: v1(5440,6390) 5502.6,6390 R71.1@5692.6,6200 ; P10.1@5680,5480 R71.1@5680,6200
  Bottom Layer w16: v1(5280,6360) 5410,6360 v1(5440,6390)
NetP9_1: P11.1 R69.1 U15.1 | length 1290.3
  Top Layer w10: U15.1@5240,9170 5270,9170 5290,9150 v1(5290,9140) ; 5570,9170 5570,9070 5780,8860 P11.1@5780,8400
  Top Layer w20: v1(5450,9170) R69.1@5642.6,9170
  Bottom Layer w16: v1(5290,9140) 5420,9140 v1(5450,9170)
NetP11_1: P2.1 R2.1 | length 580.2
  Top Layer w10: P2.1@2500,4990 R2.1@2962.6,4990 2920,4947.4 ; R2.1@2960,4992.6 2960,5050
NetP12_1: P1.1 R1.1 | length 452.6
  Top Layer w40: P1.1@2520,3780 R1.1@2972.6,3780
NetP14_1: P8.1 R78.1 | length 527.5
  Top Layer w20: P8.1@5420,3720 5862.6,3720 R78.1@5922.6,3780
NetR13_PGA1_1: pad.0@4990,8950 R54.1 R55.1 R56.1 R57.1 U12.6 U15.3 | length 1357.7
  Top Layer w10: U12.6@5080,9105 5135,9105 5148.82,9118.82 U15.3@5240,9118.82
  Top Layer w16: 4730,9310 4733.46,9306.54 R56.1@4733.46,9190 ; R55.1@4733.46,9090 4733.46,8936.54 4780,8890 4900,8890 4995,8985 4995,9060 5040,9105 ; R57.1@4743.46,9300 4870,9300 4950,9220 4950,9150 4995,9105 U12.6@5080,9105
NetR13_PGA1_2: R55.2 U9.12 | length 156.8
  Top Layer w10: U9.12@4529.25,9137.2 4578.85,9137.2 4626.06,9090 R55.2@4666.54,9090
NetR13_PGA2_1: pad.1@4980,6140 R44.1 R45.1 R46.1 R47.1 U10.6 U13.3 | length 1437.7
  Top Layer w10: U10.6@5070,6325 5125,6325 5138.82,6338.82 U13.3@5230,6338.82
  Top Layer w16: 4720,6530 4723.46,6526.54 R46.1@4723.46,6410 ; R45.1@4723.46,6310 4723.46,6156.54 4770,6110 4890,6110 4985,6205 4985,6280 5030,6325 ; R47.1@4733.46,6520 4860,6520 4940,6440 4940,6370 4985,6325 U10.6@5070,6325
  Top Layer w20: pad.1@4985,6125 4985,6205
NetR13_PGA2_2: R45.2 U7.12 | length 156.8
  Top Layer w10: U7.12@4519.25,6357.2 4568.85,6357.2 4616.06,6310 R45.2@4656.54,6310
NetR13_PGA3_1: pad.1@5000,7600 R49.1 R50.1 R51.1 R52.1 U11.6 U14.3 | length 1411.9
  Top Layer w10: U11.6@5070,7775 5125,7775 5138.82,7788.82 U14.3@5230,7788.82
  Top Layer w16: 4720,7980 4723.46,7976.54 R51.1@4723.46,7860 ; R50.1@4723.46,7760 4723.46,7606.54 4770,7560 4890,7560 4985,7655 4985,7730 5030,7775 ; R52.1@4733.46,7970 4860,7970 4940,7890 4940,7820 4985,7775 U11.6@5070,7775 ; 4957.11,7627.11 4972.89,7627.11 pad.1@5000,7600
NetR13_PGA3_2: R50.2 U8.12 | length 156.8
  Top Layer w10: U8.12@4519.25,7807.2 4568.85,7807.2 4616.06,7760 R50.2@4656.54,7760
NetR14_PGA1_2: R56.2 U9.14 | length 138
  Top Layer w10: U9.14@4529.25,9188.39 4664.92,9188.39 R56.2@4666.54,9190
NetR14_PGA2_2: R46.2 U7.14 | length 138
  Top Layer w10: U7.14@4519.25,6408.39 4654.92,6408.39 R46.2@4656.54,6410
NetR14_PGA3_2: R51.2 U8.14 | length 138
  Top Layer w10: U8.14@4519.25,7858.39 4654.92,7858.39 R51.2@4656.54,7860
NetR15_PGA1_2: R57.2 U9.15 | length 168.8
  Top Layer w10: U9.15@4529.25,9213.98 4573.98,9213.98 4650,9290 R57.2@4666.54,9290
NetR15_PGA2_2: R47.2 U7.15 | length 168.8
  Top Layer w10: U7.15@4519.25,6433.98 4563.98,6433.98 4640,6510 R47.2@4656.54,6510
NetR15_PGA3_2: R52.2 U8.15 | length 168.8
  Top Layer w10: U8.15@4519.25,7883.98 4563.98,7883.98 4640,7960 R52.2@4656.54,7960
NetR16_PGA1_2: R54.2 U9.11 | length 202.6
  Top Layer w10: U9.11@4529.25,9111.61 4570.5,9111.61 4666.54,9015.58 R54.2@4666.54,8990
NetR16_PGA2_2: R44.2 U7.11 | length 202.6
  Top Layer w10: U7.11@4519.25,6331.61 4560.5,6331.61 4656.54,6235.58 R44.2@4656.54,6210
NetR16_PGA3_2: R49.2 U8.11 | length 202.6
  Top Layer w10: U8.11@4519.25,7781.61 4560.5,7781.61 4656.54,7685.58 R49.2@4656.54,7660
NetR17_PGA1_2: R37.2 U9.1 | length 146.5
  Top Layer w10: R37.2@4193.46,9310 4263.9,9239.57 U9.1@4310.75,9239.57
NetR17_PGA2_2: R29.2 U7.1 | length 146.5
  Top Layer w10: R29.2@4183.46,6530 4253.9,6459.57 U7.1@4300.75,6459.57
NetR17_PGA3_2: R33.2 U8.1 | length 146.5
  Top Layer w10: R33.2@4183.46,7980 4253.9,7909.57 U8.1@4300.75,7909.57
NetR18_PGA1_2: R34.2 U9.5 | length 201.3
  Top Layer w10: R34.2@4193.46,9010 4250,9066.54 4250,9120 4267.2,9137.2 U9.5@4310.75,9137.2
NetR18_PGA2_2: R26.2 U7.5 | length 201.3
  Top Layer w10: R26.2@4183.46,6230 4240,6286.54 4240,6340 4257.2,6357.2 U7.5@4300.75,6357.2
NetR18_PGA3_2: R30.2 U8.5 | length 201.3
  Top Layer w10: R30.2@4183.46,7680 4240,7736.54 4240,7790 4257.2,7807.2 U8.5@4300.75,7807.2
NetR19_PGA1_2: R36.2 U9.2 | length 134
  Top Layer w10: R36.2@4193.46,9210 4197.44,9213.98 U9.2@4300,9213.98
  Top Layer w16: R36.2@4187.95,9210 4183.98,9213.98 R36.2@4193.46,9213.98 ; U9.2@4300,9213.98 U9.2@4310.75,9213.98
NetR19_PGA2_2: R28.2 U7.2 | length 134
  Top Layer w10: R28.2@4183.46,6430 4187.44,6433.98 U7.2@4290,6433.98
  Top Layer w16: R28.2@4177.95,6430 4173.98,6433.98 R28.2@4183.46,6433.98 ; U7.2@4290,6433.98 U7.2@4300.75,6433.98
NetR19_PGA3_2: R32.2 U8.2 | length 134
  Top Layer w10: R32.2@4183.46,7880 4187.44,7883.98 U8.2@4290,7883.98
  Top Layer w16: R32.2@4177.95,7880 4173.98,7883.98 R32.2@4183.46,7883.98 ; U8.2@4290,7883.98 U8.2@4300.75,7883.98
NetR20_PGA1_2: R35.2 U9.4 | length 139.2
  Top Layer w10: R35.2@4200,9110 4252.8,9162.8 U9.4@4310.75,9162.8
  Top Layer w16: R35.2@4193.46,9110 R35.2@4200,9110
NetR20_PGA2_2: R27.2 U7.4 | length 139.2
  Top Layer w10: R27.2@4190,6330 4242.8,6382.8 U7.4@4300.75,6382.8
  Top Layer w16: R27.2@4183.46,6330 R27.2@4190,6330
NetR20_PGA3_2: R31.2 U8.4 | length 139.2
  Top Layer w10: R31.2@4190,7780 4242.8,7832.8 U8.4@4300.75,7832.8
  Top Layer w16: R31.2@4183.46,7780 R31.2@4190,7780
NetR39_aafilter1_1: R91.1 R98.1 U19.15 | length 365
  Top Layer w16: U19.15@6268.94,9213.98 6346.57,9213.98 R91.1@6382.6,9250 ; R91.1@6380,9260 6440,9320 6490,9320 6560,9250 R98.1@6562.6,9250
NetR39_aafilter2_1: R99.1 R103.1 U21.15 | length 365
  Top Layer w16: U21.15@6548.94,3823.98 6626.57,3823.98 R99.1@6662.6,3860 ; R99.1@6660,3870 6720,3930 6770,3930 6840,3860 R103.1@6842.6,3860
NetR41_aafilter1_2: R68.1 R69.2 R76.1 U19.2 | length 426.9
  Top Layer w16: R69.2@5740,9170 R76.1@5822.6,9170 ; R68.1@5820,9060 R76.1@5820,9150 ; R76.1@5830,9160 5830,9210 5860,9240 5920,9240 5946.02,9213.98 U19.2@6011.06,9213.98
NetR41_aafilter2_2: R77.1 R78.2 R82.1 U21.2 | length 426.9
  Top Layer w16: R78.2@6020,3780 R82.1@6102.6,3780 ; R77.1@6100,3670 R82.1@6100,3760 ; R82.1@6110,3770 6110,3820 6140,3850 6200,3850 6226.02,3823.98 U21.2@6291.06,3823.98
NetR42_aafilter1_2: R81.2 R87.2 R91.2 U19.11 | length 588.7
  Top Layer w16: R81.2@6177.4,8950 6240,8950 6360,9070 ; U19.11@6268.94,9111.61 6318.39,9111.61 6360,9070 ; R87.2@6457.4,9122.6 R91.2@6457.4,9250 ; R87.2@6460,9120 6410,9070 6360,9070
NetR42_aafilter2_2: R85.2 R92.2 R99.2 U21.11 | length 588.7
  Top Layer w16: R85.2@6457.4,3560 6520,3560 6640,3680 ; U21.11@6548.94,3721.61 6598.39,3721.61 6640,3680 ; R92.2@6737.4,3732.6 R99.2@6737.4,3860 ; R92.2@6740,3730 6690,3680 6640,3680
NetR43_aafilter1_2: R76.2 U19.4 | length 116.6
  Top Layer w16: R76.2@5897.4,9170 5904.61,9162.8 U19.4@6011.06,9162.8
NetR43_aafilter2_2: R82.2 U21.4 | length 116.6
  Top Layer w16: R82.2@6177.4,3780 6184.61,3772.8 U21.4@6291.06,3772.8
NetR44_aafilter1_1: R87.1 U19.13 | length 127.2
  Top Layer w16: U19.13@6268.94,9162.8 6349.8,9162.8 R87.1@6382.6,9130
NetR44_aafilter2_1: R92.1 U21.13 | length 127.2
  Top Layer w16: U21.13@6548.94,3772.8 6629.8,3772.8 R92.1@6662.6,3740
NetR45_aafilter1_2: R68.2 R81.1 U19.6 | length 384
  Top Layer w16: R68.2@5890,9057.4 5890,9070 5931.61,9111.61 6068.39,9111.61 6102.6,9077.4 R81.1@6102.6,8950
NetR45_aafilter2_2: R77.2 R85.1 U21.6 | length 384
  Top Layer w16: R77.2@6170,3667.4 6170,3680 6211.61,3721.61 6348.39,3721.61 6382.6,3687.4 R85.1@6382.6,3560
NetR47_input1_1: R9.1 U3.2 | length 122.8
  Top Layer w16: R9.1@3100,9107.4 3142.6,9107.4 3155,9095 U3.2@3217.64,9095
NetR47_input1_2: R9.2 U3.3 | length 122.8
  Top Layer w16: R9.2@3100,9032.6 3142.6,9032.6 3155,9045 U3.3@3217.64,9045
NetR47_input2_1: R4.1 U2.2 | length 122.8
  Top Layer w16: R4.1@3090,7717.4 3132.6,7717.4 3145,7705 U2.2@3207.64,7705
NetR47_input2_2: R4.2 U2.3 | length 122.8
  Top Layer w16: R4.2@3090,7642.6 3132.6,7642.6 3145,7655 U2.3@3207.64,7655
NetR47_input3_1: R8.1 U1.2 | length 122.8
  Top Layer w16: R8.1@3100,6317.4 3142.6,6317.4 3155,6305 U1.2@3217.64,6305
NetR47_input3_2: R8.2 U1.3 | length 122.8
  Top Layer w16: R8.2@3100,6242.6 3142.6,6242.6 3155,6255 U1.3@3217.64,6255
NetR48_1: R70.1 R73.2 U17.3 | length 324.2
  Top Layer w16: R73.2@5705.12,9660 R70.1@5705.12,9800 ; R73.2@5740,9640 5765,9615 U17.3@5913.86,9615
NetU2_PGA1_3: U9.3 U9.13 U12.2 | length 571.1
  Top Layer w10: U9.3@4310.75,9188.39 4401.61,9188.39 4427.2,9162.8 4587.2,9162.8 4600,9150 U12.2@4850,9150
  Top Layer w16: U12.2@4850,9150 4858.86,9150 U12.2@4863.86,9155
NetU2_PGA2_3: U7.3 U7.13 U10.2 | length 571.1
  Top Layer w10: U7.3@4300.75,6408.39 4391.61,6408.39 4417.2,6382.8 4577.2,6382.8 4590,6370 U10.2@4840,6370
  Top Layer w16: U10.2@4840,6370 4848.86,6370 U10.2@4853.86,6375
NetU2_PGA3_3: U8.3 U8.13 U11.2 | length 571.1
  Top Layer w10: U8.3@4300.75,7858.39 4391.61,7858.39 4417.2,7832.8 4577.2,7832.8 4590,7820 U11.2@4840,7820
  Top Layer w16: U11.2@4840,7820 4848.86,7820 U11.2@4853.86,7825
SEL0_aa80281: JP10.2 U18.5 | length 546.6
  Top Layer w10: JP10.2@5970,7400 5930,7440 5930,7610 5950,7630 5990,7630 6009.29,7649.29 U18.5@6009.29,7660.63 ; v1(6050,7570) v1@6050,7580
  Bottom Layer w16: JP10.2@5970,7400 6050,7480 v1(6050,7570)
SEL0_aa80282: JP1.2 U4.5 | length 546.6
  Top Layer w10: JP1.2@3280,4670 3240,4710 3240,4880 3260,4900 3300,4900 3319.29,4919.29 U4.5@3319.29,4930.63 ; v1(3360,4840) v1@3360,4850
  Bottom Layer w16: JP1.2@3280,4670 3360,4750 v1(3360,4840)
SEL1_aa80281: JP11.2 U18.6 | length 404.8
  Top Layer w8: JP11.2@6050,7860 6110,7800 6110,7685.96 6090,7665.96 6090,7630 6120,7600
  Top Layer w10: 6120,7600 6150,7600 6170.71,7620.71 U18.6@6170.71,7660.63
SEL1_aa80282: JP2.2 U4.6 | length 404.8
  Top Layer w8: JP2.2@3360,5130 3420,5070 3420,4955.96 3400,4935.96 3400,4900 3430,4870
  Top Layer w10: 3430,4870 3460,4870 3480.71,4890.71 U4.6@3480.71,4930.63
SEL2_aa80281: JP13.2 U23.5 | length 187.6
  Top Layer w10: JP13.2@6690,7440 6743.74,7493.74 6793.74,7493.74 6829.29,7529.29 U23.5@6829.29,7540.63
SEL2_aa80282: JP4.2 U6.5 | length 187.6
  Top Layer w10: JP4.2@4000,4710 4053.74,4763.74 4103.74,4763.74 4139.29,4799.29 U6.5@4139.29,4810.63
SEL3_aa80281: JP12.2 U23.6 | length 459
  Top Layer w10: JP12.2@6690,7300 6740,7300 6810,7370 6890,7370 v1(6900,7380) ; v1(6920,7500) 6960.63,7540.63 U23.6@6990.71,7540.63
  Bottom Layer w16: v1(6900,7380) 6920,7400 v1(6920,7500)
SEL3_aa80282: JP3.2 U6.6 | length 459
  Top Layer w10: JP3.2@4000,4570 4050,4570 4120,4640 4200,4640 v1(4210,4650) ; v1(4230,4770) 4270.63,4810.63 U6.6@4300.71,4810.63
  Bottom Layer w16: v1(4210,4650) 4230,4670 v1(4230,4770)
VOS: JP5.1 JP6.2 JP14.1 JP15.2 U17.2 U17.6 U22.3 U24.3 | length 13081.4
  Top Layer w16: U17.2@5913.86,9665 5975,9665 6025,9615 U17.6@6146.14,9615
  Top Layer w20: U17.6@6146.14,9615 6215,9615 6310,9520 ; v1@6600,8960 6685,9045 U22.3@6724.84,9045 ; v1@6880,3570 6965,3655 U24.3@7004.84,3655
  Top Layer w30: JP5.1@4060,4050 JP5.1@4070,4060 ; v1(4550,4340) 4590,4340 5570,3360 6650,3360 6945,3655 ; 4929.84,4000.16 4990.16,4000.16 5150,4160 5860,4160 6110,4410 6110,5380 6320,5590 6680,5590 7070,5980 7070,6260 6860,6470 6780,6470 JP14.1@6770,6460 ; 6310,9520 6440,9520 v1(6610,9350) ; v1(6600,8970) 6600,8400 6930,8070 7330,8070 v1(7550,7850) ; v1(7130,6810) 7250,6930 JP15.2@7250,7300
  Bottom Layer w30: JP5.1@4060,4060 v1(4270,4060) v1(4550,4340) ; 4560,4350 JP6.2@4560,4570 4560,4640 ; v1(6600,8970) 6610,8980 v1(6610,9350) ; JP14.1@6770,6470 6860,6470 7130,6740 v1(7130,6810) ; v1(6880,3580) 6890,3590 ; JP15.2@7250,7300 7250,7370 7550,7670 v1(7550,7850)
pads on no net: J1.0 J2.0 J3.0 POWER-A1.0 U10.1 U10.5 U10.8 U11.1 U11.5 U11.8 U12.1 U12.5 U12.8 U16.3 U16.5 U17.1 U17.5 U17.8 U22.1 U22.5 U22.8 U24.1 U24.5 U24.8

## Polygon pours and split planes (outlines as drawn)
AVSS on Bottom Layer (hatched 90Degree grid 8 track 8, remove dead copper): 7840,9950 2050,9950 2050,3050 7840,3050
GND on Internal Plane 1 (split plane): 2020.02,3020.01 7869.96,3020.01 7860.01,9979.99 2020.02,9979.99
AVDD on Internal Plane 2 (split plane): 2020.02,3020.01 7869.96,3020.01 7860.01,9979.99 2020.02,9979.99

## Keep-outs
Keep-Out Layer:
  lines w10: 2050,3050 7840,3050 7840,9950 2050,9950 2050,3050

## Other copper
Top Layer:
  text "Layer 1" at 7980,3860 h70
Bottom Layer:
  text "Layer 4" at 7980,3510 h70
Internal Plane 1 (plane layer: these items are gaps in the copper):
  text "Layer 2" at 7980,3740 h70
Internal Plane 2 (plane layer: these items are gaps in the copper):
  text "Layer 3" at 7980,3620 h70

## Silkscreen, mask and mechanical layers (free items; w line width, h text height)
Top Overlay:
  lines w10: 4990,4210 5990,4210 5990,5090 4990,5090 4990,5400 3660,5400 3660,5550 2110,5550 2100,5550 2100,4320 ; 2100,4320 3940,4320 3940,4450 4990,4450 4990,3160 2100,3160 2100,4280 2100,4320 ; 5030,3160 5030,4130 6740,4130 6740,4800 7730,4800 7730,3160 5030,3160
  text "LTC1563 AA Channel" at 2950,9510 h50
  text "AD8021 AA Channel" at 2850,8120 h50
  text "AD8513 AA Channel" at 2870,6610 h50
  text "AD8028 Anti-Aliasing Filter" at 2260,5400 h70
  text "Output" at 5780,4850 h70 r270
  text "Input" at 2410,4520 h70
  text "Output" at 6880,4300 h70 r90
  text "Input" at 2390,4150 h70
  text "Output" at 4470,3590 h70
  text "Input" at 5260,3260 h70
  text "LTC1563 Anti-Aliasing Filter" at 6350,3190 h70
  text "AD8513 Anti-Aliasing Filter" at 3608,3180 h70
Mechanical 5:
  lines w1: 2000,3000 7880,3000 7880,10000 2000,10000 2000,3000

## Dimensions
2050,3050 to 7840,3050 on Mechanical 1
2050,3050 to 2050,9950 on Mechanical 1

## Text inside footprints (layer, text, board x,y; h text height)
JP7: Top Overlay "2" at 5230,5950 h50 r180; Top Overlay "1" at 5210,6050 h50 r180; Top Overlay "9" at 4670,6050 h50 r180; Top Overlay "10" at 4670,5950 h50 r180
JP8: Top Overlay "2" at 5230,7400 h50 r180; Top Overlay "1" at 5210,7500 h50 r180; Top Overlay "9" at 4670,7500 h50 r180; Top Overlay "10" at 4670,7400 h50 r180
JP9: Top Overlay "2" at 5240,8730 h50 r180; Top Overlay "1" at 5220,8830 h50 r180; Top Overlay "9" at 4680,8830 h50 r180; Top Overlay "10" at 4680,8730 h50 r180